# Altium PCB LMAT_AMT_V4.PcbDoc (part 2 of 2)
Units mm, origin at the board's own origin, x right, y up, seen from the top; angles counter-clockwise.
Board outline 36.5 x 40.75 mm, 4 copper layers (Top Layer, PWR, GND, Bottom Layer), stack 1.572 mm thick; 123 components, 51 nets, 267 pads, 150 vias.
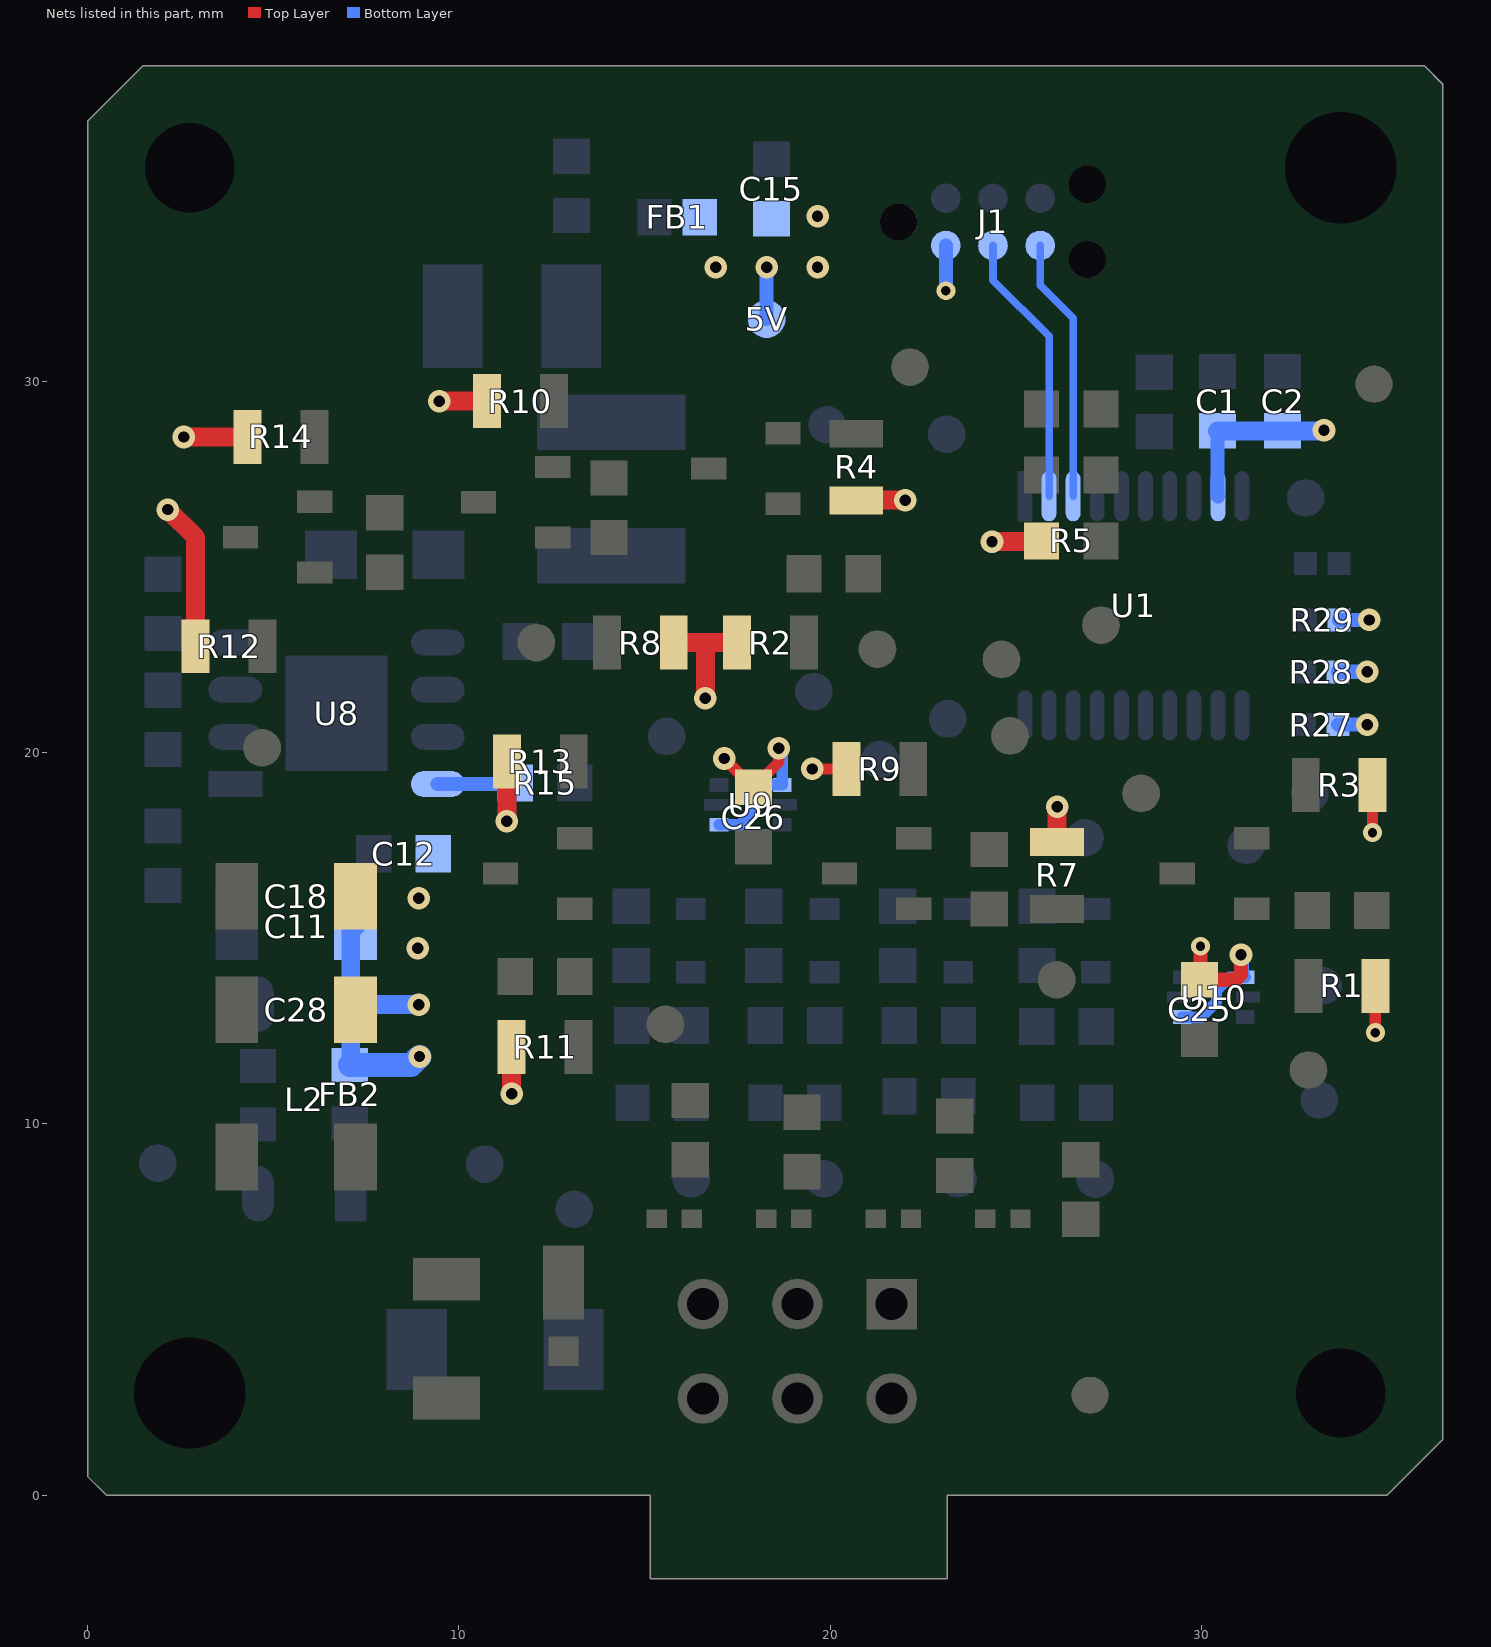
[diagram p4: the nets of this part, all layers, seen from the top]

## Via types
v1: diameter 0.61, hole 0.305, Top Layer to Bottom Layer, tented both sides, 128 vias
v2: diameter 0.508, hole 0.254, Top Layer to Bottom Layer, tented both sides, 22 vias

## Nets (pads, with @x,y where several pads share a name; then routed paths per layer and width w, separated by ;. In a path a pad name is that pad's centre, name@x,y a point inside that pad or via, vN(x,y) a via of type N, cw(c..) or ccw(c..) an arc to the next point about the centre after c; other vN are vias at no path point) (continued)
UART_RX: J1.6 U1.3 | length 7.1
  Bottom Layer w0.203: J1.6@25.654,33.655 25.654,32.588 26.544,31.699 U1.3@26.544,26.902
UART_TX: J1.4 U1.2 | length 7.4
  Bottom Layer w0.203: J1.4@24.384,33.655 24.384,32.715 25.894,31.206 U1.2@25.894,26.902
VCC_5V: 5V.1 C1.1 C2.2 C15.1 C25.1 C26.1 FB1.2 J1.2 R1.1 R2.1 R3.1 R4.1 R5.2 R7.1 R8.1 R9.1 R10.1 R11.1 R12.1 R13.1 R14.1 R27.2 R28.2 R29.2 U1.9 U9.1 U9.4 U10.1 U10.4 | length 41.7
  Top Layer w0.305: v1(17.145,19.837) 17.92,19.063 C26.1@17.932,19.063 18.618,19.748 v1(18.618,20.117) ; v1(19.52,19.558) R9.1@20.436,19.558 ; v2(34.606,17.842) R3.1@34.606,19.126 ; v2(34.682,12.457) R1.1@34.682,13.716
  Top Layer w0.381: v2(29.972,14.783) 29.972,13.906 C25.1@29.947,13.881 30.924,13.881 31.064,14.021 v1(31.064,14.554)
  Top Layer w0.508: v1(2.159,26.543) 2.91,25.792 R12.1@2.91,22.86 ; v1(2.591,28.499) R14.1@4.307,28.499 ; v1(9.474,29.464) R10.1@10.759,29.464 ; v1(11.292,18.15) R13.1@11.292,19.761 R13.1@11.292,20.179 ; v1(11.419,10.806) R11.1@11.419,12.065 ; R8.1@15.784,22.962 16.637,22.962 ; v1(16.637,21.463) 16.637,22.962 ; R2.1@17.49,22.962 16.637,22.962 ; R4.1@20.701,26.786 20.712,26.797 v1(22.022,26.797) ; v1(24.359,25.679) 25.675,25.679 R5.2@25.692,25.697 ; R7.1@26.111,17.602 v1(26.111,18.542)
  Bottom Layer w0.305: U9.1@17.005,18.055 17.572,18.055 17.856,18.339 17.856,18.646 18.34,19.13 U9.4@18.705,19.13 18.705,20.03 v1(18.618,20.117) ; U10.1@29.477,12.873 29.993,12.873 30.404,13.284 30.404,13.589 30.763,13.948 U10.4@31.176,13.948 ; v1(31.064,14.554) 31.12,14.498 31.12,13.983 31.14,13.983 U10.4@31.176,13.948 ; U10.4@31.177,13.948 U10.4@31.176,13.948
  Bottom Layer w0.381: 5V.1@18.288,31.674 v1(18.288,33.071) ; v2(23.114,32.436) J1.2@23.114,33.655 ; C1.1@30.429,28.664 30.429,26.917 U1.9@30.444,26.902 ; R27.2@33.673,20.752 v1(34.468,20.752) ; R28.2@33.673,22.174 v1(34.468,22.174) ; R29.2@33.699,23.571 v1(34.519,23.571)
  Bottom Layer w0.508: C1.1@30.429,28.664 C2.2@32.182,28.664 33.338,28.664 33.325,28.677 v1(33.299,28.677)
  other v1: 16.916,33.071 19.66,33.071 19.66,34.442
VCC_IN: C11.2 C12.1 C18.2 C28.2 FB2.2 L2.5 R15.2 U8.8 | length 9.6
  Bottom Layer w0.381: U8.8@9.431,19.152 R15.2@11.443,19.152
  Bottom Layer w0.508: FB2.2@7.061,11.585 7.089,11.612 L2.5@7.089,13.218 ; C11.2@7.213,15.316 7.089,15.191 L2.5@7.089,13.218 ; v1(8.915,13.208) 8.905,13.218 L2.5@7.089,13.218
  Bottom Layer w0.635: FB2.2@7.061,11.585 8.715,11.585 v1(8.941,11.811)
  other v1: 8.89,14.732 8.915,16.078
pads on no net: FID1.0 FID2.0 FID3.0 FID4.0 J1.0 U1.5 U1.6

## Polygon pours and split planes (outlines as drawn)
GND on Bottom Layer "GND_L04_P219" (solid, remove dead copper, pour order 219): 0,0.5 0.5,0 15.15,0 15.15,-2.25 23.15,-2.25 23.15,0 35,0 36.5,1.5 36.5,38 36,38.5 1.5,38.5 0,37
VCC_IN on Bottom Layer "VCC_IN_L04_P215" (solid, remove dead copper, pour order 215): 6.137,11.033 5.918,11.252 5.918,16.281 6.18,16.544 7.62,16.51 8.397,16.51 8.712,16.825 8.712,19.609 8.788,19.685 10.315,19.685 11.938,19.685 12.065,19.558 12.065,18.567 11.989,18.491 10.897,18.491 10.795,18.39 10.795,16.217 9.652,15.074 9.652,12.217 9.652,11.633 9.052,11.033
DGND on Bottom Layer "BOTTOM_LAYER-DGND_ALL" (solid, remove dead copper, pour order 218): 17.117,6.223 6.833,6.223 5.766,7.29 5.766,10.287 5.385,10.668 1.019,10.668 0.508,10.157 0.508,1.143 1.016,0.635 15.494,0.635 15.875,0.254 15.875,-1.143 16.383,-1.651 22.098,-1.651 22.479,-1.27 22.479,0.149 23.368,1.038 23.368,6.223 22.987,6.604 19.939,6.604 19.558,6.223
NetC17_2 on Bottom Layer "NETC17_2_L04_P214" (solid, remove dead copper, pour order 214): 6.198,7.061 7.188,6.056 11.263,6.056 11.684,6.477 11.684,9.738 10.704,10.719 6.485,10.719 6.198,10.448
VCC_5V on Bottom Layer "VCC_5V_L04_P212" (solid, remove dead copper, pour order 212): 20.306,32.487 20.396,32.576 20.396,34.928 20.145,35.179 16.104,35.179 16.104,32.766 16.383,32.487
NetC14_2 on Bottom Layer "NETC14_2_L04_P216" (solid, remove dead copper, pour order 216): 11.557,28.321 11.938,27.94 16.507,27.94 17.018,28.451 17.018,30.099 15.621,31.496 15.621,35.179 11.811,35.179 11.557,34.925 11.557,29.464
NetC16_2 on Bottom Layer "NETC16_2_L04_P217" (solid, remove dead copper, pour order 217): 17.45,26.67 17.78,26.34 17.78,23.038 16.021,21.279 15.564,21.279 8.509,21.279 8.509,22.225 12.649,22.225 12.649,23.571 12.294,23.927 9.246,23.927 8.763,24.409 8.763,26.365 9.068,26.67
NetD6_2 on Bottom Layer "NETD6_2_L04_P213" (solid, remove dead copper, pour order 213): 11.43,2.134 11.43,1.753 11.709,1.473 14.91,1.473 15.265,1.829 15.265,3.124 15.672,3.531 17.501,3.531 17.78,3.81 17.78,5.969 17.475,6.274 12.751,6.274 11.43,4.953
GND on Top Layer "GND_L01_P211" (solid, remove dead copper, pour order 211): 0,0.5 0.5,0 15.15,0 15.15,-2.25 23.15,-2.25 23.15,0 35,0 36.5,1.5 36.5,38 36,38.5 1.5,38.5 0,37
DGND on Top Layer "TOP_LAYER-DGND_ALL" (solid, remove dead copper, pour order 210): 1.121,10.77 9.169,10.77 11.303,8.636 13.626,8.636 13.97,8.292 13.97,6.93 14.677,6.223 19.558,6.223 19.939,6.604 22.987,6.604 23.368,6.223 23.368,1.038 22.479,0.149 22.479,-1.27 22.098,-1.651 16.383,-1.651 15.875,-1.143 15.875,0.254 15.494,0.635 1.016,0.635 0.508,1.143 0.508,10.157
NetC17_2 on Top Layer "NETC17_2_L01_P209" (solid, remove dead copper, pour order 209): 8.103,4.75 7.874,4.979 7.874,6.807 7.518,7.163 6.325,7.163 6.147,7.341 6.147,10.515 6.482,10.85 9.292,10.85 11.379,8.763 12.878,8.763 13.665,7.976 13.665,7.214 13.64,4.953 13.437,4.75 10.287,4.75 8.941,4.75
NetD6_2 on Top Layer "NETD6_2_L01_P207" (solid, remove dead copper, pour order 207): 15.265,2.413 15.265,1.829 14.986,1.549 11.379,1.549 11.278,1.651 11.278,3.962 11.608,4.293 14.961,4.293 15.265,3.988
VCC_IN on Top Layer "VCC_IN_L01_P208" (solid, remove dead copper, pour order 208): 9.449,11.582 9.195,11.328 6.68,11.328 6.147,11.862 6.147,16.739 6.147,17.439 6.259,17.551 9.296,17.551 9.449,17.399 9.449,16.281 9.449,12.497
VCC_5V on PWR (split plane): 35.789,37.99 35.99,37.789 35.99,1.711 34.789,0.51 23.533,0.51 23.533,6.06 23.525,6.135 23.504,6.207 23.468,6.273 23.421,6.331 22.978,6.773 22.92,6.821 22.854,6.856 22.782,6.878 22.708,6.885 13.849,6.885 9.796,10.939 9.738,10.986 9.672,11.022 9.6,11.043 9.525,11.051 0.51,11.051 0.51,36.789 1.711,37.99
DGND on PWR (split plane): 13.42,6.232 13.478,6.184 13.544,6.149 13.616,6.127 13.691,6.12 22.549,6.12 22.767,5.901 22.767,0.334 22.726,0.284 22.678,0.195 22.658,0.129 22.649,0.1 22.64,0 22.64,-1.74 15.66,-1.74 15.66,0 15.651,0.1 15.642,0.129 15.622,0.195 15.574,0.284 15.511,0.361 15.434,0.424 15.345,0.472 15.279,0.492 15.25,0.501 15.15,0.51 0.711,0.51 0.51,0.711 0.51,10.285 9.366,10.285
GND on GND (split plane): 35.789,37.99 35.99,37.789 35.99,1.711 34.789,0.51 23.533,0.51 23.533,6.06 23.525,6.135 23.504,6.207 23.468,6.273 23.421,6.331 22.978,6.773 22.92,6.821 22.854,6.856 22.782,6.878 22.708,6.885 13.849,6.885 9.796,10.939 9.738,10.986 9.672,11.022 9.6,11.043 9.525,11.051 0.51,11.051 0.51,36.789 1.711,37.99
DGND on GND (split plane): 13.42,6.232 13.478,6.184 13.544,6.149 13.616,6.127 13.691,6.12 22.549,6.12 22.767,5.901 22.767,0.334 22.726,0.284 22.678,0.195 22.658,0.129 22.649,0.1 22.64,0 22.64,-1.74 15.66,-1.74 15.66,0 15.651,0.1 15.642,0.129 15.622,0.195 15.574,0.284 15.511,0.361 15.434,0.424 15.345,0.472 15.279,0.492 15.25,0.501 15.15,0.51 0.711,0.51 0.51,0.711 0.51,10.285 9.366,10.285

## Keep-outs
Keep-Out Layer:
  lines w0.127: 0,5.651 cw(c2.749,2.749) 5.651,0 ; 0,32.842 ccw(c2.75,35.75) 5.649,38.51 ; 30.842,38.5 ccw(c33.744,35.744) 36.5,32.842 ; 30.861,0 cw(c33.745,2.762) 36.5,5.652 ; 1.5,38.5 36,38.5 36.5,38 36.5,1.5 35,0 23.15,0 23.15,-2.25 15.15,-2.25 15.15,0 0.5,0 0,0.5 0,37 1.5,38.5 ; 1.5,38.5 1.5,38.5
  text "'.Layer_Name'" at 402.844,-241.071 h3.81

## Other copper
Top Layer:
  pour cut-out: 28.591,12.764 29.249,12.764 29.718,13.233 29.718,14.327 29.313,14.732 28.052,14.732 27.924,14.86 27.924,16.201 27.687,16.437 21.683,16.437 21.464,16.219 21.464,15.361 21.683,15.143 23.512,15.143 23.654,15 24.878,15 25.279,14.599 25.279,14.064 25.279,13.456 25.675,13.06 28.296,13.06
  pour cut-out: 6.904,25.38 6.904,27.721 6.793,27.832 6.793,30.176 7.528,30.912 23.647,30.912 24.282,31.547 24.282,32.106 24.079,32.309 24.079,32.287 23.196,31.404 6.629,31.404 5.615,30.39 5.615,29.847 5.334,29.566 3.834,29.566 3.415,29.146 2.273,29.146 1.943,28.817 1.943,28.206 2.311,27.838 3.428,27.838 3.803,27.463 5.229,27.463 5.334,27.358 5.334,26.289 5.661,25.962 5.661,25.373 5.673,25.361 6.896,25.361
  pour cut-out: 10.605,17.922 10.604,20.613 10.817,20.826 13.567,20.826 14.088,20.305 14.405,20.305 14.715,19.994 14.715,19.571 14.414,19.269 13.961,19.269 13.906,19.214 13.906,17.261 13.724,17.079 12.516,17.079 12.093,17.503 11.024,17.503
  pour cut-out: 14.141,11.029 14.516,11.405 15.203,11.405 15.61,11.811 15.853,11.811 16.382,12.34 16.382,13.019 15.902,13.499 15.223,13.499 14.678,12.954 14.211,12.954 13.906,13.259 13.906,16.218 13.687,16.437 12.553,16.437 12.334,16.219 12.334,14.989 12.116,14.77 12.116,14.376 12.116,13.03 11.938,12.852 11.938,11.278 12.186,11.029
  pour cut-out: 32.314,20.367 31.703,19.761 31.283,19.341 31.283,18.456 31.128,18.301 30.746,18.301 30.564,18.119 30.564,17.261 30.746,17.079 32.405,17.079 32.776,17.45 34.214,17.45 34.381,17.298 34.831,17.298 35.154,17.62 35.154,18.072 35.293,18.212 35.293,19.978 35.038,20.234 35.038,20.752 34.733,21.057 33.396,21.057 33.298,21.155 33.036,21.155 32.436,21.755 30.277,21.755 29.578,21.057 32.169,21.057 32.314,20.912
  pour cut-out: 18.288,29.629 18.364,29.705 19.78,29.705 19.783,29.709 19.976,29.516 19.976,28.32 19.669,28.013 18.495,28.013 18.288,28.219
  pour cut-out: 13.382,21.926 11.856,21.926 11.223,22.559 11.223,23.796 11.744,24.317 11.744,25.361 11.744,28.181 11.744,28.297 11.618,28.423 11.223,28.423 10.261,28.423 9.867,28.816 9.206,28.816 8.836,29.186 8.836,30.331 8.75,30.416 8.839,30.505 12.611,30.505 13.546,29.57 13.546,27.026 13.665,26.911 14.605,26.911 14.857,26.659 14.857,25.224 14.694,25.06 14.694,24.473 14.681,24.46 14.999,24.143 18.566,24.143 18.783,23.925 18.783,22.187 18.522,21.926 17.323,21.926 17.196,21.933 17.031,21.768 17.031,18 16.369,17.338 15.94,17.338 15.634,17.644 15.634,21.59 15.298,21.926
  pour cut-out: 20.772,23.622 22.263,23.622 22.571,23.93 22.571,22.101 22.365,21.895 20.383,21.895 19.723,22.555 19.723,24.092 19.888,24.257 20.295,24.257 20.295,24.099
  pour cut-out: 28.763,23.989 28.763,23.587 28.856,23.493 29.605,23.493 29.718,23.381 29.718,22.733 29.667,22.682 27.14,22.682 26.66,23.162 26.66,29.288 26.099,29.85 26.099,30.048 26.149,30.099 27.915,30.099 28.078,29.936 28.078,26.303 28.763,25.619
  pour cut-out: 9.647,11.405 9.647,10.668 9.969,10.668 9.97,11.405
  pour cut-out: 26.36,26.032 26.36,25.702 26.66,25.702 26.66,26.032
  pour cut-out: 26.309,27.861 26.309,27.531 26.609,27.531 26.609,27.861
  pour cut-out: 26.334,29.614 26.334,29.284 26.635,29.284 26.635,29.614
  pour cut-out: 5.673,25.361 6.553,25.361 6.553,26.303 5.658,26.303
  pour cut-out: 5.56,12.159 5.56,9.393 5.939,9.393 5.939,12.158
  pour cut-out: 16.785,17.785 17.178,17.785 17.178,18.113 16.785,18.113
  pour cut-out: 14.097,6.898 16.675,6.898 16.675,5.65 14.097,5.65
  pour cut-out: 27.546,8.329 27.546,8.166 27.754,7.958 28.309,7.958 28.61,7.657 28.61,7.173 28.081,6.644 25.617,6.644 24.766,7.496 24.766,7.887 23.833,7.887 23.47,7.524 23.47,6.845 23.597,6.718 23.597,6.363 23.157,5.923 22.573,5.923 21.664,6.831 21.664,7.888 22.548,8.771 22.548,9.568 22.796,9.817 24.06,9.817 25.106,8.771 27.546,8.771
  pour cut-out: 19.717,6.858 20.955,6.858 20.955,6.211 19.717,6.211
  pour cut-out: 17.526,6.724 18.764,6.724 18.764,6.077 17.526,6.077
  pour cut-out: 31.826,12.732 30.762,12.732 30.706,12.676 30.505,12.876 30.505,13.056 30.505,13.652 30.734,13.881 30.772,13.843 34.036,13.843 34.163,13.716 34.138,13.691 34.138,11.548 33.22,10.629 32.541,10.629 32.06,11.11 32.06,12.498
  pour cut-out: 10.576,4.265 10.76,4.265 10.76,3.436 10.576,3.436
  text "'.Layer_Name'" at 396.875,-241.325 h3.81
Bottom Layer:
  pour cut-out: 33.35,24.714 33.35,26.241 33.624,26.515 33.624,29 33.299,29.324 31.686,29.324 31.094,28.731 31.094,25.869 32.249,24.714
  pour cut-out: 17.029,11.175 16.713,11.492 16.713,11.719 17.042,12.047 17.042,13.698 16.954,13.785 16.954,14.514 16.772,14.696 15.624,14.696 15.253,15.067 15.253,15.278 15.214,15.316 13.932,15.316 13.832,15.217 13.832,10.023 14.09,9.766 14.745,9.766 14.788,9.723 14.788,9.551 14.468,9.232 14.468,8.798 15.569,7.697 16.596,7.697 17.075,8.176 17.075,10.031 17.029,10.076
  pour cut-out: 25.371,18.974 21.273,18.974 20.955,19.292 20.955,21.971 21.641,22.657 25.476,22.657 27.813,20.32 27.813,16.971 27.238,16.396 26.753,16.396 26.729,16.372 26.289,16.372 26.065,16.596 26.065,17.115 25.536,17.644 25.536,18.809
  pour cut-out: 26.319,15.18 27.575,15.18 27.575,14.69 26.448,14.69 26.319,14.819
  pour cut-out: 5.914,16.612 5.914,16.192 7.01,16.192 7.01,16.612
  pour cut-out: 4.847,14.399 4.847,14.16 5.563,14.16 5.563,14.399
  pour cut-out: 5.829,11.328 6.017,11.328 6.147,11.199 6.147,9.195 5.512,9.195 5.512,11.328
  pour cut-out: 31.572,20.447 31.572,18.275 31.807,18.04 33.255,18.04 33.738,18.524 33.738,19.514 34.087,19.863 34.95,19.863 35.128,20.041 35.128,23.266 31.572,23.266
  pour cut-out: 10.017,11.662 10.262,11.417 10.262,10.732 9.55,10.732 9.55,11.468
  pour cut-out: 12.202,8.001 12.202,8.458 12.304,8.56 13.767,8.56 13.926,8.4 13.926,7.003 14.148,6.782 19.384,6.782 19.715,7.112 23.211,7.112 23.886,6.438 23.886,0.676 23.978,0.584 23.978,0.356 23.927,0.305 23.622,0.305 23.368,0.559 23.368,6.223 22.987,6.604 19.939,6.604 19.761,6.426 19.761,5.828 20.056,5.534 20.056,4.799 19.461,4.205 18.421,4.205 18.136,4.49 18.136,5.944 17.805,6.274 14.184,6.274 13.868,6.589 12.202,6.589
  pour cut-out: 29.286,29.845 31.623,29.845 31.623,29.261 29.286,29.261
  pour cut-out: 14.376,11.887 16.713,11.887 16.713,11.303 14.376,11.303
  pour cut-out: 17.513,11.719 17.513,12.006 17.465,12.054 17.465,13.595 17.401,13.658 17.401,15.31 17.458,15.367 19.252,15.367 19.445,15.174 19.445,14.718 19.467,14.696 20.373,14.696 20.574,14.495 20.574,13.307 20.636,13.244 20.636,12.02 20.345,11.73 20.345,11.303 20.611,11.038 20.611,9.361 20.716,9.256 21.017,9.256 21.321,8.952 21.321,8.523 20.822,8.025 20.505,8.025 20.177,7.697 19.498,7.697 19.046,8.149 19.046,9.402 18.682,9.766 17.671,9.766 17.489,9.948 17.489,11.152 17.513,11.175
  pour cut-out: 21.29,9.931 22.835,9.931 22.955,9.811 22.955,9.189 22.623,8.857 22.623,8.197 23.123,7.697 23.782,7.697 24.109,8.025 24.607,8.025 24.953,8.371 24.953,8.8 24.243,9.51 24.243,14.111 23.647,14.707 22.789,14.707 22.438,15.058 22.438,15.307 22.428,15.316 21.209,15.316 21.159,15.366 21.064,15.366 21.006,15.308 21.006,13.694 21.071,13.628 21.071,11.97 21.096,11.946 21.096,10.125
  pour cut-out: 24.803,14.895 24.754,14.845 24.754,9.998 24.998,9.754 26.187,9.754 26.324,9.641 26.324,8.169 27.569,6.924 28.307,6.924 28.61,7.228 28.61,8.162 27.854,8.919 27.854,9.3 28.042,9.488 28.042,15.443 24.88,15.443 24.803,15.366
  text "'.Layer_Name'" at 397.561,-241.3 h3.81
PWR (plane layer: these items are gaps in the copper):
  pour cut-out: 18.223,20.117 ccw(c18.618,20.117) 18.618,19.722 ccw(c18.618,20.117) 19.013,20.117 ccw(c18.618,20.117) 18.618,20.512 ccw(c18.618,20.117)
  pour cut-out: 30.653,14.555 ccw(c31.048,14.555) 31.048,14.16 ccw(c31.048,14.555) 31.443,14.555 ccw(c31.048,14.555) 31.048,14.951 ccw(c31.048,14.555)
  lines w0.762: 0,10.668 9.525,10.668 13.691,6.502 22.708,6.502 23.15,6.06 23.15,0
  text "'.Layer_Name'" at 397.586,-241.325 h3.81
GND (plane layer: these items are gaps in the copper):
  lines w0.762: 0,10.668 9.525,10.668 13.691,6.502 22.708,6.502 23.15,6.06 23.15,0
  lines w1.016: 34.163,36.195 34.163,36.322
  text "'.Layer_Name'" at 397.256,-241.376 h3.81

## Silkscreen, mask and mechanical layers (free items; w line width, h text height)
Top Overlay:
  lines w0.254: 28.415,21.35 28.415,20.58 29.185,20.58 ; 28.415,29.81 28.415,30.58 29.185,30.58 ; 32.645,20.58 33.415,20.58 33.415,21.35 ; 32.645,30.58 33.415,30.58 33.415,29.81
  text "LMAT_AMT_V4" at 6.35,33.757 h2.03
  text "'.Layer_Name'" at 400.177,-241.071 h3.81
Bottom Overlay:
  lines w0.203: 20.549,9.881 20.701,9.728 20.701,9.564 ; 24.079,9.957 24.232,9.804 24.232,9.677 ; 27.972,9.798 28.188,9.582
  lines w0.254: 27.521,11.722 27.521,11.582 28.029,11.074
  text "PROG_CONN" at 27.559,29.896 h1.02
  text "'.Layer_Name'" at 401.193,-240.69 h3.81
Top Paste:
  text "'.Layer_Name'" at 404.876,-240.817 h3.81
Bottom Paste:
  text "'.Layer_Name'" at 404.876,-241.325 h3.81
Top Solder:
  text "'.Layer_Name'" at 407.162,-240.817 h3.81
Bottom solder:
  region: 19.19,19.406 18.213,19.406 18.213,17.793 19.19,17.793
  region: 17.336,19.406 16.523,19.406 16.523,17.78 17.336,17.78
  region: 31.661,14.224 30.683,14.224 30.683,12.611 31.661,12.611
  region: 29.858,14.224 28.994,14.224 28.994,12.598 29.858,12.598
Drill Guide:
  text "'.Layer_Name'" at 408.178,-241.198 h3.81
Fabrication Notes:
  drawing of 347 lines, arcs and shapes, not listed
  text "Layer" at 128.13,159.957 h1.52
  text "Name" at 138.542,159.957 h1.52
  text "Material" at 162.158,159.957 h1.52
  text "Thickness" at 183.996,159.957 h1.52
  text "Constant" at 200.501,159.957 h1.52
  text "Board Layer Stack" at 214.976,159.957 h1.52
  text "1" at 128.13,156.909 h1.52
  text "Top Overlay" at 138.542,156.909 h1.52
  text "2" at 128.13,153.861 h1.52
  text "Top Solder" at 138.542,153.861 h1.52
  text "Solder Resist" at 162.158,153.861 h1.52
  text "0.020mm" at 183.996,153.861 h1.52
  text "3.5" at 200.501,153.861 h1.52
  text "3" at 128.13,150.812 h1.52
  text "Top Layer" at 138.542,150.812 h1.52
  text "Copper" at 162.158,150.812 h1.52
  text "0.035mm" at 183.996,150.812 h1.52
  text "4" at 128.13,147.764 h1.52
  text "Dielectric 1" at 138.542,147.764 h1.52
  text "PP-006" at 162.158,147.764 h1.52
  text "0.128mm" at 183.996,147.764 h1.52
  text "4.2" at 200.501,147.764 h1.52
  text "5" at 128.13,144.716 h1.52
  text "Dielectric 2" at 138.542,144.716 h1.52
  text "0.088mm" at 183.996,144.716 h1.52
  text "4.2" at 200.501,144.716 h1.52
  text "6" at 128.13,141.668 h1.52
  text "PWR" at 138.542,141.668 h1.52
  text "Copper" at 162.158,141.668 h1.52
  text "0.035mm" at 183.996,141.668 h1.52
  text "7" at 128.13,138.62 h1.52
  text "Dielectric 3" at 138.542,138.62 h1.52
  text "FR-4" at 162.158,138.62 h1.52
  text "1.000mm" at 183.996,138.62 h1.52
  text "4.2" at 200.501,138.62 h1.52
  text "8" at 128.13,135.572 h1.52
  text "GND" at 138.542,135.572 h1.52
  text "Copper" at 162.158,135.572 h1.52
  text "0.035mm" at 183.996,135.572 h1.52
  text "9" at 128.13,132.524 h1.52
  text "Dielectric 4" at 138.542,132.524 h1.52
  text "PP-006" at 162.158,132.524 h1.52
  text "0.088mm" at 183.996,132.524 h1.52
  text "4.2" at 200.501,132.524 h1.52
  text "10" at 128.13,129.476 h1.52
  text "Dielectric 5" at 138.542,129.476 h1.52
  text "0.128mm" at 183.996,129.476 h1.52
  text "4.2" at 200.501,129.476 h1.52
  text "11" at 128.13,126.428 h1.52
  text "Bottom Layer" at 138.542,126.428 h1.52
  text "Copper" at 162.158,126.428 h1.52
  text "0.035mm" at 183.996,126.428 h1.52
  text "12" at 128.13,123.38 h1.52
  text "Bottom solder" at 138.542,123.38 h1.52
  text "Solder Resist" at 162.158,123.38 h1.52
  text "0.020mm" at 183.996,123.38 h1.52
  text "3.5" at 200.501,123.38 h1.52
  text "13" at 128.13,120.332 h1.52
  text "Bottom Overlay" at 138.542,120.332 h1.52
  text "Total Pcb Thickness = 1.612MM  +/- 10%" at 133.491,109.125 h2.54
  text "Finished cu Thickness: 1 OZ" at 143.67,102.751 h2.54
  text "FABRICATION NOTES:" at -278.643,17.706 h2.03
  text "1. LATEST VERSION OF ALL REFERENCED IPC SPECIFICATIONS TO BE USED." at -278.643,12.626 h1.78
  text "2. ALL MULTILAYER PC BOARDS MUST BE PRODUCED IN ACCORDANCE IPC-A-600, CLASS 2." at -278.643,7.547 h1.78
  text "3. INSPECT ALL MULTILAYER PC BOARDS IN ACCORDANCE WITH IPC-6012, CLASS 2." at -278.643,2.467 h1.78
  text "4. MATERIAL:  THIN LAMINATE, FR4 COPPER CLAD 1 OZ PER LAYER" at -278.643,-2.613 h1.78
  text "1.6 MM +/-10% THICK, COLOR GREEN," at -273.614,-6.043 h1.78
  text "MINIMUM CTI (PER IEC 60112 USING SOLUTION A) = 175." at -273.614,-9.853 h1.78
  text "5. FABRICATE BOARDS USING THE GERBER FILES CONTAINED IN FABRICATION FOLDER." at -278.643,-15.313 h1.78
  text "6. DRILL DATA ARE CONTAINED IN THE FABRICATION FOLDER." at -278.643,-20.647 h1.78
  text "7. ALL HOLE DIAMETERS MUST BE PER DRILL CHART +/-0.003 INCHES TOLERANCE," at -278.643,-25.854 h1.78
  text "UNLESS OTHERWISE SPECIFIED." at -273.563,-29.589 h1.78
  text "8. PLATED-THRU HOLES TO HAVE COPPER WALL THICKNESS NOT LESS THAN 0.001 INCHES." at -278.643,-34.744 h1.78
  text "THICKNESS TO BE DETERMINED BY IPC-6012, CLASS 2." at -274.071,-38.428 h1.78
  text "9. SURFACE FINISH PROCESS MUST BE HAL LEAD-FREE" at -278.643,-43.634 h1.78
  text "10. SILKSCREEN BOTH SIDES WITH WHITE EPOXY NON-CONDUCTIVE INK." at -278.643,-48.08 h1.78
  text "SILKSCREEN MAY BE TRIMMED OFF ANY SOLDERED ENTITY." at -272.141,-51.89 h1.78
  text "11. SOLDER MASK BOTH SIDES WITH LIQUID PHOTO IMAGEABLE SOLDER MASK (LPI)," at -278.643,-56.97 h1.78
  text "MEETING IPC-SM-840, CLASS 2, HIGH PERFORMANCE SPECIFICATIONS." at -272.293,-60.476 h1.78
  text "FINISH: SOLDER MASK OVER BARE COPPER (SMOBC)." at -272.293,-64.413 h1.78
  text "12. WARP AND TWIST SHALL BE LESS THAN 0.0075 INCH PER INCH." at -278.643,-69.924 h1.78
  text "INSPECT PER IPC-TM-650, 2.4.22." at -272.141,-73.531 h1.78
  text "13. ALL BOARDS MUST BE DATE CODED USING A FOUR DIGIT CODE," at -278.643,-78.433 h1.78
  text "YEAR FOLLOWED BY WEEK (e.g. 0449 = 49TH WEEK OF 2004)." at -272.141,-82.04 h1.78
  text "14. ALL DIMENSIONS AND HOLE DIAMETERS APPLY TO THE FINISHED BOARD." at -278.643,-87.45 h1.78
  text "15. PADS MUST BE FINISHED TO WITHIN +/-0.0015 INCHES OF THE MINOR DIMENSION (PAD WIDTH)" at -278.643,-92.403 h1.78
  text "AND +/-0.002 INCHES OF THE MAJOR DIMENSION (PAD LENGTH)." at -272.064,-96.264 h1.78
  text "16. FIDUCIALS MUST BE FREE OF ANY MARKINGS." at -278.643,-100.912 h1.78
  text "17. BARE BOARD TO BE ELECTRICALLY TESTED IN ACCORDANCE WITH IPC-ET-652 AND MARKED AS TESTED." at -278.643,-106.119 h1.78
  text "18. BOARDS SHALL BE UL-RECOGNIZED AND UL-MARKED. UL FIRE RETARDANT RATING 94V-0 OR HIGHER." at -278.643,-111.199 h1.78
  text "19. ROHS: ALL MATERIALS MUST BE COMPLIANT WITH THE ROHS DIRECTIVE." at -278.643,-116.279 h1.78
  text "20. EACH PCB MUST BE INDIVIDUALLY BAGGED." at -279.273,-121.666 h1.78
  text "21. ALL VIA MUST BE TENTED." at -279.146,-127.254 h1.78
Board Outlines:
  the board outline again, w0.127
  text "'.Layer_Name'" at 397.459,-241.503 h3.81
Dimensions:
  lines w0.127: 1.5,38.5 1.5,38.5 ; 1.5,38.5 0,37 0,0.5 0.5,0 15.15,0 15.15,-2.25 23.15,-2.25 23.15,0 35,0 36.5,1.5 36.5,38 36,38.5 1.5,38.5
  lines w0.203: 0,-1.27 0,0.182
  text "'.Layer_Name'" at 397.535,-241.376 h3.81
Assembly Notes:
  text "ASSEMBLY NOTES:" at -290.859,136.133 h2.03
  text "CAUTION :" at -291.011,132.41 h2.03
  text "COMPONENTS ARE SUBJECT TO DAMAGE BY STATIC ELECTRICITY." at -275.721,132.207 h2.03
  text "1. SERIALIZATION PER #900-984." at -276.127,128.371 h2.03
  text "2.  REFER BOM FOR COMPONENT PLACEMENT." at -276.584,123.672 h2.03
  text "3. MARK WITH SERIAL NUMBER ON A STICKER PASTED." at -276.66,118.872 h2.03
  text "4.  LABELS SHALL NOT TO BE PLACED OVER EXPOSED COPPER." at -276.508,114.131 h2.03
  text "5. MANUFACTURE PER TS 16469 STANDARD." at -276.381,109.906 h2.03
  text "6. BOARD MUST BE CLEANED EVEN IF USING NO CLEAN FLUX." at -276.381,105.715 h2.03
  text "7.  ASSEMBLY SHALL BE ELECTRICALLY TESTED." at -276.254,101.524 h2.03
  text "8.  SOLDER AND ASSEMBLE AS PER INDUSTRY WORKMANSHIP STANDARDS." at -276.254,97.206 h2.03
  text "9. ASSEMBLY MUST BE ROHS COMPLIANT." at -276.508,93.015 h2.03
1MM:
  lines w0.127: -352.935,-131.666 -345.315,-131.666 ; -352.935,-4.666 -345.315,-4.666 ; -352.935,122.334 -345.315,122.334 ; -251.335,-258.666 -251.335,-251.046 ; -251.335,241.714 -251.335,249.334 ; -149.735,-258.666 -149.735,-251.046 ; -149.735,241.714 -149.735,249.334 ; -48.135,-258.666 -48.135,-251.046 ; -48.135,241.714 -48.135,249.334 ; 1,36.568 1,2 2,1 16,1 16,-1 22.479,-1 22.479,1 35,1 35.5,1.5 35.5,36.89 34.89,37.5 2.054,37.5 1.919,37.5 1,36.581 ; 53.465,-258.666 53.465,-251.046 ; 53.465,241.714 53.465,249.334 ; 155.065,-258.666 155.065,-251.046 ; 155.065,241.714 155.065,249.334 ; 256.665,-258.666 256.665,-251.046 ; 256.665,241.714 256.665,249.334 ; 302.385,-251.046 337.945,-251.046 452.245,-251.046 ; 358.265,-258.666 358.265,-251.046 ; 358.265,241.714 358.265,249.334 ; 452.245,-220.566 452.245,-251.046 ; 452.245,-131.666 459.865,-131.666 ; 452.245,-4.666 459.865,-4.666 ; 452.245,122.334 459.865,122.334 ; 452.245,-251.046 452.245,241.714 -345.315,241.714 -345.315,-251.046 452.245,-251.046 ; -352.935,-258.666 459.865,-258.666 459.865,249.334 -352.935,249.334 -352.935,-258.666
  lines w0.254: 266.724,-250.947 299.744,-250.947 452.144,-250.947 452.144,-212.847 ; 266.724,-203.458 452.017,-203.458 ; 299.744,-243.327 360.704,-243.327 452.144,-243.327 ; 299.744,-235.707 360.704,-235.707 452.009,-235.707 ; 299.744,-228.087 360.704,-228.087 452.144,-228.087 ; 299.744,-220.467 360.704,-220.467 ; 325.144,-250.947 325.144,-243.327 ; 335.304,-235.707 335.304,-212.847 ; 360.704,-250.947 360.704,-212.847 ; 383.564,-250.947 383.564,-243.327 ; 393.724,-250.947 393.724,-243.327 ; 441.984,-250.947 441.984,-243.327 ; 266.724,-212.847 299.744,-212.847 ; 266.724,-212.847 266.724,-250.995 299.744,-250.995 299.744,-212.847 ; 266.724,-212.847 266.724,-193.044 452.144,-193.044 452.144,-212.847 ; 299.744,-212.847 452.144,-212.847
  text "1" at -302.592,244.508 h1.78
  text "2" at -201.119,244.508 h1.78
  text "3" at -99.646,244.508 h1.78
  text "4" at 1.98,244.508 h1.78
  text "5" at 103.537,244.508 h1.78
  text "6" at 205.095,244.508 h1.78
  text "7" at 306.737,244.508 h1.78
  text "8" at 408.21,244.508 h1.78
  text "A" at -349.76,183.599 h1.78
  text "A" at 455.42,183.599 h1.78
  text "B" at -349.76,56.599 h1.78
  text "B" at 455.42,56.599 h1.78
  text "C" at -349.76,-70.401 h1.78
  text "C" at 455.42,-70.401 h1.78
  text "D" at -349.76,-197.401 h1.78
  text "D" at 455.42,-197.401 h1.78
  text "THE INFORMATION CONTAINED IN THIS DOCUMENT IS PROPRIETARY OF CUSTOMER." at 448.086,-197.727 h1.91
  text "ANY PRODUCTION IN PART OR WHOLE WITHOUT PRIOR WRITTEN AUTHORIZATION OF CUSTOMER IS PROHIBITED." at 448.293,-201.626 h1.91
  text "CUSTOMER:  LUMAX" at 408.466,-209.576 h2.54
  text "DATE" at 358.291,-215.514 h1.14
  text "Drawn By: Harshavardhan K" at 333.145,-215.641 h1.14
  text "UNLESS OTHERWISE" at 298.611,-217.45 h1.78
  text "Design Partner:" at 447.445,-218.714 h2.54
  text "'.Print_Date'" at 358.672,-219.324 h1.78
  text "SPECIFIED:" at 297.966,-220.213 h1.78
  text "DATE" at 358.418,-223.134 h1.14
  text "ALL DIMENSIONS ARE" at 298.865,-223.419 h1.78
  text "Designed By : Vijendra N" at 333.094,-223.515 h1.14
  text "EmbDes Technologies Pvt. Ltd." at 447.445,-224.27 h2.54
  text "'.Print_Date'" at 358.672,-226.944 h1.78
  text "IN INCHES" at 297.407,-227.02 h1.78
  text "DATE" at 358.672,-230.5 h1.14
  text "Checked By : Uday Kumar K" at 333.094,-230.627 h1.14
  text "TOLERANCES" at 296.137,-230.83 h1.78
  text "PROJECT NAME:    LMAT_AMT_V4" at 447.445,-233.096 h2.03
  text "(DECIMAL):" at 297.407,-233.37 h1.78
  text "'.Print_Date'" at 358.672,-234.31 h1.78
  text ".X +/-0.1" at 297.407,-237.18 h1.78
  text "REF ID" at 358.748,-238.659 h1.14
  text ".XX +/-0.01" at 297.214,-239.929 h1.78
  text "'.Layer_Name'" at 382.143,-240.69 h3.81
  text "LAYER NAME:" at 447.445,-240.945 h2.03
  text "ASSY BOTTOM" at 422.732,-241.911 h3.81
  text ".XXX +/-0.005" at 297.087,-242.723 h1.78
  text "Scale" at 322.868,-245.898 h1.14
  text "Size" at 390.803,-245.994 h1.14
  text "REV" at 449.223,-245.994 h1.14
  text "ANGLES +/-0.5" at 293.597,-246.07 h1.78
  text "Sheet     of" at 379.881,-246.121 h1.14
  text "DWG NO" at 440.343,-246.152 h1.14
  text "DO NOT SCALE" at 356.523,-246.787 h1.78
  text "1:1" at 314.603,-248.534 h1.78
  text "1" at 368.247,-248.915 h1.78
  text "1" at 378.24,-248.946 h1.78
  text "D" at 388.872,-249.141 h2.29
  text "1.0" at 449.35,-249.169 h1.78
  text "DRAWING" at 356.523,-249.962 h1.78
  text "1" at -302.592,-255.745 h1.78
  text "2" at -201.119,-255.745 h1.78
  text "3" at -99.646,-255.745 h1.78
  text "4" at 1.98,-255.745 h1.78
  text "5" at 103.537,-255.745 h1.78
  text "6" at 205.095,-255.745 h1.78
  text "7" at 306.737,-255.745 h1.78
  text "8" at 408.21,-255.745 h1.78
Bottom Assembly:
  text "'.Layer_Name'" at 397.637,-240.944 h1.02
Template:
  lines w0.127: -352.054,-131.912 -344.434,-131.912 ; -352.054,-4.912 -344.434,-4.912 ; -352.054,122.088 -344.434,122.088 ; -250.454,-258.912 -250.454,-251.292 ; -250.454,241.468 -250.454,249.088 ; -148.854,-258.912 -148.854,-251.292 ; -148.854,241.468 -148.854,249.088 ; -47.254,-258.912 -47.254,-251.292 ; -47.254,241.468 -47.254,249.088 ; 54.346,-258.912 54.346,-251.292 ; 54.346,241.468 54.346,249.088 ; 155.946,-258.912 155.946,-251.292 ; 155.946,241.468 155.946,249.088 ; 257.546,-258.912 257.546,-251.292 ; 257.546,241.468 257.546,249.088 ; 303.266,-251.292 338.826,-251.292 453.126,-251.292 ; 359.146,-258.912 359.146,-251.292 ; 359.146,241.468 359.146,249.088 ; 453.126,-220.812 453.126,-251.292 ; 453.126,-131.912 460.746,-131.912 ; 453.126,-4.912 460.746,-4.912 ; 453.126,122.088 460.746,122.088 ; 453.126,-251.292 453.126,241.468 -344.434,241.468 -344.434,-251.292 453.126,-251.292 ; -352.054,-258.912 -352.054,249.088 460.746,249.088 460.746,-258.912 -352.054,-258.912
  lines w0.254: 267.577,-251.241 300.597,-251.241 ; 267.577,-203.752 452.87,-203.752 ; 300.47,-251.241 267.587,-251.241 267.577,-251.231 267.577,-213.141 ; 300.597,-243.621 361.557,-243.621 452.997,-243.621 ; 300.597,-236.001 361.557,-236.001 452.862,-236.001 ; 300.597,-228.381 361.557,-228.381 452.997,-228.381 ; 300.597,-220.761 361.557,-220.761 ; 325.997,-251.241 325.997,-243.621 ; 336.157,-236.001 336.157,-213.141 ; 361.557,-251.241 361.557,-213.141 ; 384.417,-251.241 384.417,-243.621 ; 394.577,-251.241 394.577,-243.621 ; 442.837,-251.241 442.837,-243.621 ; 267.577,-213.141 300.597,-213.141 ; 267.577,-213.141 267.577,-193.338 452.997,-193.338 452.997,-213.141 ; 300.597,-251.241 300.597,-213.141 ; 300.597,-251.241 452.997,-251.241 452.997,-213.141 ; 300.597,-213.141 452.997,-213.141
  text "1" at -301.711,244.262 h1.78
  text "2" at -200.238,244.262 h1.78
  text "3" at -98.765,244.262 h1.78
  text "4" at 2.861,244.262 h1.78
  text "5" at 104.418,244.262 h1.78
  text "6" at 205.976,244.262 h1.78
  text "7" at 307.618,244.262 h1.78
  text "8" at 409.091,244.262 h1.78
  text "A" at -348.879,183.353 h1.78
  text "A" at 456.301,183.353 h1.78
  text "B" at -348.879,56.353 h1.78
  text "B" at 456.301,56.353 h1.78
  text "C" at -348.879,-70.647 h1.78
  text "C" at 456.301,-70.647 h1.78
  text "THE INFORMATION CONTAINED IN THIS DOCUMENT IS PROPRIETARY OF CUSTOMER." at 268.726,-197.513 h1.91
  text "D" at -348.879,-197.647 h1.78
  text "D" at 456.301,-197.647 h1.78
  text "ANY PRODUCTION IN PART OR WHOLE WITHOUT PRIOR WRITTEN AUTHORIZATION OF CUSTOMER IS PROHIBITED." at 268.933,-201.412 h1.91
  text "CUSTOMER:  LUMAX" at 315.64,-209.324 h2.54
  text "Drawn By : Harshavardhan K" at 303.137,-215.681 h1.14
  text "DATE" at 338.697,-215.681 h1.14
  text "UNLESS OTHERWISE" at 270.117,-218.221 h1.78
  text "Design Partner:" at 363.843,-218.341 h2.54
  text "'.Print_Date'" at 338.697,-219.491 h1.78
  text "SPECIFIED:" at 276.467,-220.761 h1.78
  text "Designed By : Aravinth D" at 302.679,-223.301 h1.14
  text "DATE" at 338.697,-223.301 h1.14
  text "Embdes Engineering Solutions Pvt Ltd" at 363.843,-223.86 h2.54
  text "ALL DIMENSIONS ARE" at 268.847,-224.571 h1.78
  text "'.Print_Date'" at 338.697,-227.111 h1.78
  text "IN INCHES" at 275.908,-227.568 h1.78
  text "Checked By : Uday Kumar K" at 302.679,-230.921 h1.14
  text "DATE" at 338.697,-230.921 h1.14
  text "TOLERANCES" at 274.638,-231.378 h1.78
  text "PROJECT NAME:    LMAT_AMT_V4" at 363.843,-233.39 h2.03
  text "(DECIMAL):" at 275.908,-233.918 h1.78
  text "'.Print_Date'" at 338.697,-234.731 h1.78
  text ".X +/-0.1" at 275.908,-237.728 h1.78
  text "REF ID" at 303.137,-238.541 h1.14
  text ".XX +/-0.01" at 274.638,-240.268 h1.78
  text "LAYER NAME:" at 363.843,-240.756 h2.03
  text ".XXX +/-0.005" at 272.098,-242.808 h1.78
  text "Scale" at 303.137,-246.161 h1.14
  text "Sheet     of" at 364.097,-246.161 h1.14
  text "Size" at 386.957,-246.161 h1.14
  text "DWG NO" at 397.117,-246.161 h1.14
  text "REV" at 445.377,-246.161 h1.14
  text "ANGLES +/-0.5" at 272.098,-246.618 h1.78
  text "DO NOT SCALE" at 332.347,-247.431 h1.78
  text "1:1" at 310.757,-248.701 h1.78
  text "1" at 366.637,-249.209 h1.78
  text "1" at 379.337,-249.336 h1.78
  text "D" at 388.227,-249.336 h2.29
  text "1.0" at 445.504,-249.336 h1.78
  text "DRAWING" at 336.157,-249.971 h1.78
  text "1" at -301.711,-255.991 h1.78
  text "2" at -200.238,-255.991 h1.78
  text "3" at -98.765,-255.991 h1.78
  text "4" at 2.861,-255.991 h1.78
  text "5" at 104.418,-255.991 h1.78
  text "6" at 205.976,-255.991 h1.78
  text "7" at 307.618,-255.991 h1.78
  text "8" at 409.091,-255.991 h1.78
Drill Drawing:
  circle w0.254: c-102.143,138.654 r0.847
  lines w0.254: -102.99,133.998 -102.143,134.421 -101.296,133.998 -101.72,134.844 -101.296,135.691 -102.143,135.268 -102.99,135.691 -102.566,134.844 -102.99,133.998 ; -102.99,142.041 -102.566,142.041 -102.566,141.618 -101.72,141.618 -101.72,142.041 -101.296,142.041 -101.296,142.888 -101.72,142.888 -101.72,143.311 -102.566,143.311 -102.566,142.888 -102.99,142.888 -102.99,142.041 ; -102.99,145.428 -102.99,145.851 -102.566,146.274 -102.99,146.698 -102.99,147.121 -102.566,147.121 -102.143,146.698 -101.72,147.121 -101.296,147.121 -101.296,146.698 -101.72,146.274 -101.296,145.851 -101.296,145.428 -101.72,145.428 -102.143,145.851 -102.566,145.428 -102.99,145.428 ; -102.99,150.931 -101.296,150.931 -102.143,149.238 -102.99,150.931 ; -102.99,153.048 -101.296,153.048 -101.296,154.741 -102.99,154.741 -102.99,153.048
  lines w0.381: -104.508,132.855 76.341,132.855 ; -104.508,155.715 76.341,155.715 ; -90.516,129.045 -90.516,159.525 ; -75.534,129.045 -75.534,159.525 ; -47.094,129.045 -47.094,159.525 ; -34.245,129.045 -34.245,159.525 ; -15.606,129.045 -15.606,159.525 ; 22.482,129.045 22.482,159.525 ; 37.464,129.045 37.464,159.525 ; 56.408,129.045 56.408,159.525 ; -104.508,129.045 76.341,129.045 76.341,159.525 -104.508,159.525 -104.508,129.045
  text "Symbol" at -102.222,156.858 h1.83
  text "Count" at -89.373,156.858 h1.83
  text "Hole Size" at -74.391,156.858 h1.83
  text "Plated" at -45.951,156.858 h1.83
  text "Hole Type" at -33.102,156.858 h1.83
  text "Drill Layer Pair" at -14.463,156.858 h1.83
  text "Via/Pad" at 23.625,156.858 h1.83
  text "Pad Shape" at 38.607,156.858 h1.83
  text "Template" at 57.551,156.858 h1.83
  text "2" at -89.373,153.048 h1.52
  text "2.400mm (94.49mil)" at -74.391,153.048 h1.52
  text "NPTH" at -45.951,153.048 h1.52
  text "Round" at -33.102,153.048 h1.52
  text "Top Layer - Bottom Layer" at -14.463,153.048 h1.52
  text "Pad" at 23.625,153.048 h1.52
  text "Rounded" at 38.607,153.048 h1.52
  text "c10hn240" at 57.551,153.048 h1.52
  text "2" at -89.373,149.238 h1.52
  text "3.000mm (118.11mil)" at -74.391,149.238 h1.52
  text "NPTH" at -45.951,149.238 h1.52
  text "Round" at -33.102,149.238 h1.52
  text "Top Layer - Bottom Layer" at -14.463,149.238 h1.52
  text "Pad" at 23.625,149.238 h1.52
  text "Rounded" at 38.607,149.238 h1.52
  text "c10hn300" at 57.551,149.238 h1.52
  text "3" at -89.373,145.428 h1.52
  text "1.000mm (39.37mil)" at -74.391,145.428 h1.52
  text "NPTH" at -45.951,145.428 h1.52
  text "Round" at -33.102,145.428 h1.52
  text "Top Layer - Bottom Layer" at -14.463,145.428 h1.52
  text "Pad" at 23.625,145.428 h1.52
  text "Rounded" at 38.607,145.428 h1.52
  text "c100hn100" at 57.551,145.428 h1.52
  text "6" at -89.373,141.618 h1.52
  text "0.860mm (33.86mil)" at -74.391,141.618 h1.52
  text "PTH" at -45.951,141.618 h1.52
  text "Round" at -33.102,141.618 h1.52
  text "Top Layer - Bottom Layer" at -14.463,141.618 h1.52
  text "Pad" at 23.625,141.618 h1.52
  text "(Mixed)" at 38.607,141.618 h1.52
  text "(Mixed)" at 57.551,141.618 h1.52
  text "22" at -89.373,137.808 h1.52
  text "0.254mm (10.00mil)" at -74.391,137.808 h1.52
  text "PTH" at -45.951,137.808 h1.52
  text "Round" at -33.102,137.808 h1.52
  text "Top Layer - Bottom Layer" at -14.463,137.808 h1.52
  text "Via" at 23.625,137.808 h1.52
  text "Rounded" at 38.607,137.808 h1.52
  text "v51h25m0mx0" at 57.551,137.808 h1.52
  text "128" at -89.373,133.998 h1.52
  text "0.305mm (12.00mil)" at -74.391,133.998 h1.52
  text "PTH" at -45.951,133.998 h1.52
  text "Round" at -33.102,133.998 h1.52
  text "Top Layer - Bottom Layer" at -14.463,133.998 h1.52
  text "Via" at 23.625,133.998 h1.52
  text "Rounded" at 38.607,133.998 h1.52
  text "(Mixed)" at 57.551,133.998 h1.52
  text "163 Total" at -89.373,130.188 h1.52
  text "'.Layer_Name'" at 406.4,-241.071 h3.81
DXF TOP:
  drawing of 11300 lines, arcs and shapes, not listed

## Dimensions
0,0.5 to 36.5,1.5 on Dimensions
23.15,-2.25 to 36.5,38.5 on Dimensions

## Text inside footprints (layer, text, board x,y; h text height)
D1: Bottom Overlay "K" at 10.033,26.594 h1.02; Bottom Component Outlines "K" at 10.516,24.841 h1
D2: Bottom Overlay "K" at 16.866,13.97 h0.51 r270
D3: Bottom Overlay "K" at 24.105,13.894 h0.51 r270
D6: Top Overlay "K" at 13.284,7.112 h0.76 r90; Top Component Outlines "K" at 13.259,7.061 h0.76 r90
D8: Bottom Overlay "K" at 20.447,13.945 h0.51 r270
D9: Bottom Overlay "K" at 27.915,13.868 h0.76 r270
J3: Top Component Outlines "PCB EDGE" at 22.035,-2.73 h0.76 r180